# Altium PCB high_voltage_controller.PcbDoc (part 4 of 4)
Units mil, origin at the board's own origin, x right, y up, seen from the top; angles counter-clockwise.
Board outline 3135 x 1815 mil, 4 copper layers (Signal 1, Ground, Power, Signal 2), stack 23.756 mil thick; 57 components, 42 nets, 253 pads, 87 vias.
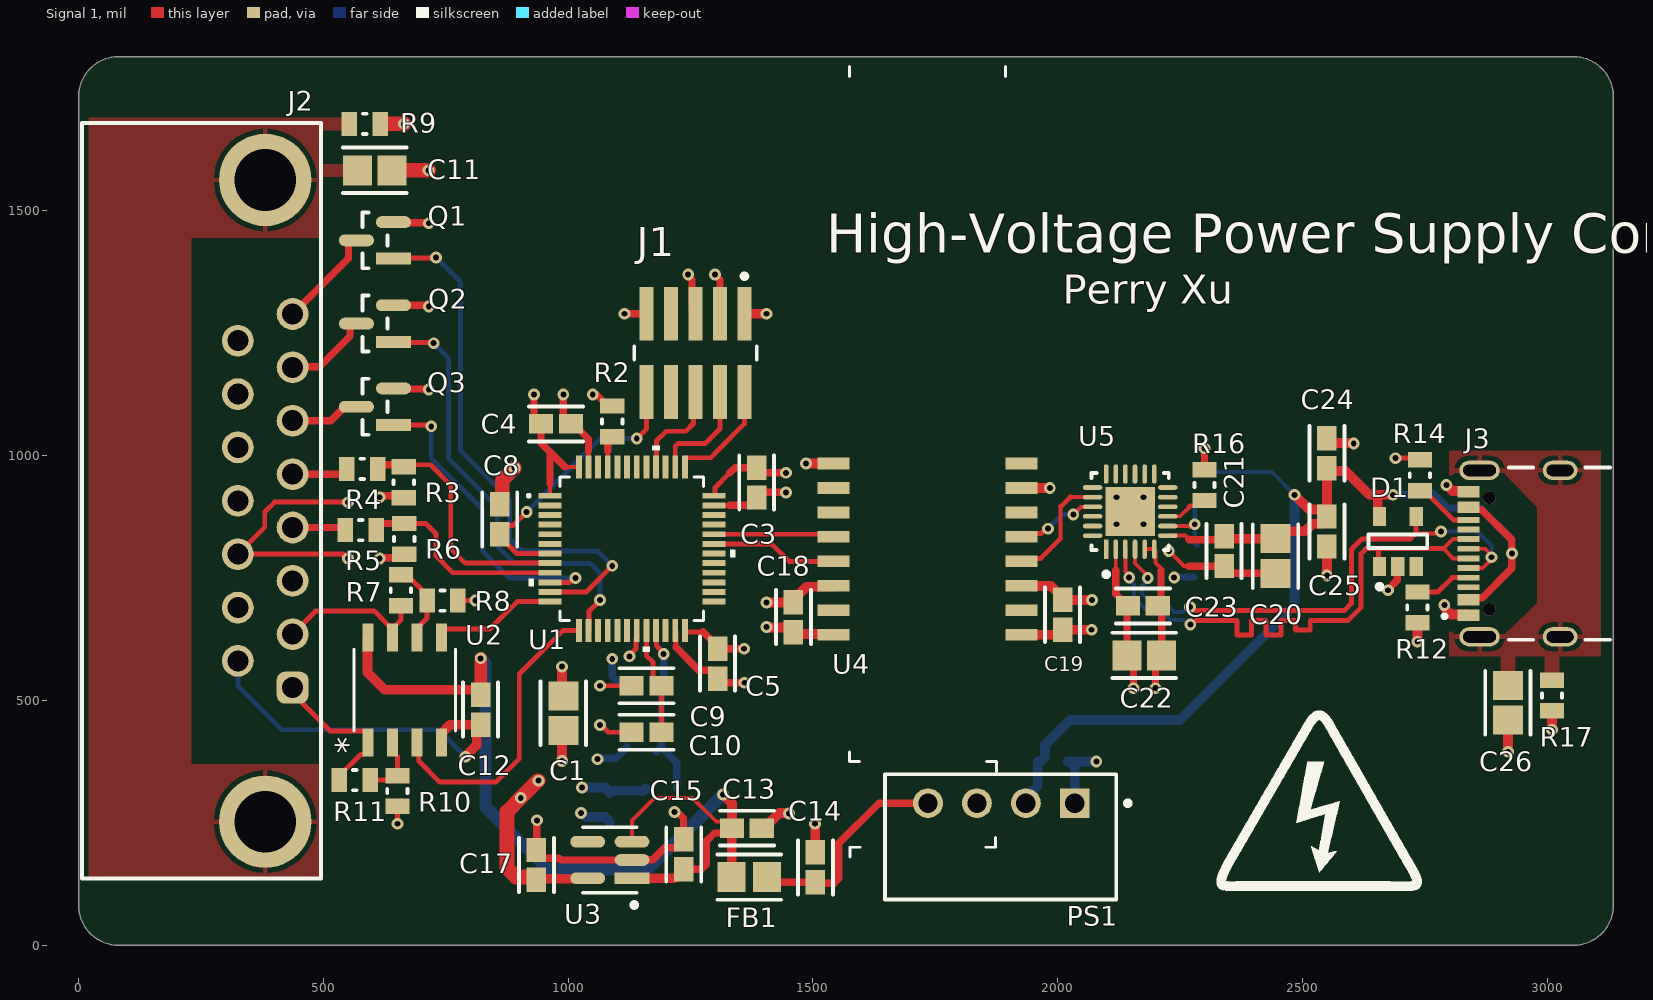
[diagram p0: Signal 1 view]

## Part data (continued)
R17: library part RC0805FR-071ML, "125mW Thick Film Resistors 150V ±100ppm/℃ ±1% 1MΩ 0805 Chip Resistor - Surface Mount ROHS", Case Code (Imperial)=0805, Manufacturer="Yageo Group", Max Operating Temperature=155°C, Max Power Dissipation=125mW, Min Operating Temperature=-55°C, Supplier Part Number=311-1.00MCRCT-ND, Temperature Coefficient=100ppm/°C, Tolerance=1%, Voltage Rating=150V, Case/Package=0805, Category="Chip SMD Resistors", China RoHS=Non-Compliant, ComponentLink1Description=https://datasheet.octopart.com:443/RC0805FR-071ML-Yageo-datasheet-175887523.pdf?src-supplier=IHS, ComponentLink1URL=https://datasheet.octopart.com:443/RC0805FR-071ML-Yageo-datasheet-175887523.pdf?src-supplier=IHS, ComponentLink2Description=https://datasheet.octopart.com:443/RC0805FR-071ML-Yageo-datasheet-103092701.pdf?src-supplier=Upverter, ComponentLink2URL=https://datasheet.octopart.com:443/RC0805FR-071ML-Yageo-datasheet-103092701.pdf?src-supplier=Upverter, ComponentLink3Description=https://datasheet.octopart.com:443/RC0805FR-071ML-Yageo-datasheet-79472498.pdf?src-supplier=Upverter, ComponentLink3URL=https://datasheet.octopart.com:443/RC0805FR-071ML-Yageo-datasheet-79472498.pdf?src-supplier=Upverter, ComponentLink4Description=https://datasheet.octopart.com:443/RC0805FR-071ML-Yageo-datasheet-8330313.pdf?src-supplier=element14+APAC, ComponentLink4URL=https://datasheet.octopart.com:443/RC0805FR-071ML-Yageo-datasheet-8330313.pdf?src-supplier=element14+APAC, ComponentLink5Description=https://datasheet.octopart.com:443/RC0805FR-071ML-Yageo-Group-datasheet-190305687.pdf?src-supplier=Future+Electronics, ComponentLink5URL=https://datasheet.octopart.com:443/RC0805FR-071ML-Yageo-Group-datasheet-190305687.pdf?src-supplier=Future+Electronics, ComponentLink6Description=https://datasheet.octopart.com:443/RC0805FR-071ML-Yageo-datasheet-164759695.pdf?src-supplier=Future+Electronics, ComponentLink6URL=https://datasheet.octopart.com:443/RC0805FR-071ML-Yageo-datasheet-164759695.pdf?src-supplier=Future+Electronics, ComponentLink7Description=https://datasheet.octopart.com:443/RC0805FR-071ML-Yageo-datasheet-127823281.pdf?src-supplier=Future+Electronics, ComponentLink7URL=https://datasheet.octopart.com:443/RC0805FR-071ML-Yageo-datasheet-127823281.pdf?src-supplier=Future+Electronics, ComponentLink8Description=https://datasheet.octopart.com:443/RC0805FR-071ML-Yageo-datasheet-137700087.pdf?src-supplier=Future+Electronics, ComponentLink8URL=https://datasheet.octopart.com:443/RC0805FR-071ML-Yageo-datasheet-137700087.pdf?src-supplier=Future+Electronics, ComponentLink9Description=https://datasheet.octopart.com:443/RC0805FR-071ML-Yageo-datasheet-12592811.pdf?src-supplier=Future+Electronics, ComponentLink9URL=https://datasheet.octopart.com:443/RC0805FR-071ML-Yageo-datasheet-12592811.pdf?src-supplier=Future+Electronics, ComponentLink10Description=https://datasheet.octopart.com:443/RC0805FR-071ML-Yageo-datasheet-8324252.pdf?src-supplier=Future+Electronics, ComponentLink10URL=https://datasheet.octopart.com:443/RC0805FR-071ML-Yageo-datasheet-8324252.pdf?src-supplier=Future+Electronics, ComponentLink11Description=https://datasheet.octopart.com:443/RC0805FR-071ML-Yageo-datasheet-62067350.pdf?src-supplier=Farnell, ComponentLink11URL=https://datasheet.octopart.com:443/RC0805FR-071ML-Yageo-datasheet-62067350.pdf?src-supplier=Farnell, ComponentLink12Description=https://datasheet.octopart.com:443/RC0805FR-071ML-Yageo-datasheet-13691069.pdf?src-supplier=Farnell, ComponentLink12URL=https://datasheet.octopart.com:443/RC0805FR-071ML-Yageo-datasheet-13691069.pdf?src-supplier=Farnell, ComponentLink13Description=https://datasheet.octopart.com/RC0805FR-071ML-Yageo-datasheet-73766026.pdf, ComponentLink13URL=https://datasheet.octopart.com/RC0805FR-071ML-Yageo-datasheet-73766026.pdf, ComponentLink14Description=https://datasheet.octopart.com:443/RC0805FR-071ML-Yageo-datasheet-118657.pdf?src-supplier=DigiKey, ComponentLink14URL=https://datasheet.octopart.com:443/RC0805FR-071ML-Yageo-datasheet-118657.pdf?src-supplier=DigiKey, ComponentLink15Description=https://datasheet.octopart.com:443/RC0805FR-071ML-Yageo-datasheet-502840.pdf?src-supplier=element14, ComponentLink15URL=https://datasheet.octopart.com:443/RC0805FR-071ML-Yageo-datasheet-502840.pdf?src-supplier=element14, ComponentLink16Description=http://sigma.octopart.com:80/conflict_mineral_statement/Yageo-company-3.pdf?src-supplier=Compliance+Statements, ComponentLink16URL=http://sigma.octopart.com:80/conflict_mineral_statement/Yageo-company-3.pdf?src-supplier=Compliance+Statements, ComponentLink17Description=http://sigma.octopart.com:80/rohs_statement/Yageo-company-2.pdf?src-supplier=Compliance+Statements, ComponentLink17URL=http://sigma.octopart.com:80/rohs_statement/Yageo-company-2.pdf?src-supplier=Compliance+Statements, Composition="Thick Film", Contact Plating=Tin, Country of Origin="Mainland China, Taiwan", Depth=1.25mm, Export Control Classification Number (ECCN) Code=EAR99, Features="Moisture Resistant", Harmonized Tariff Schedule (HTS) Code=8533.21.00.30, Height=500µm, Introduction Date=2004-09-22, Lead Free="Lead Free", Length=2mm, Lifecycle Status=Production, Manufacturer Part Number=RC0805FR-071ML, Military Standard=Not, Mounting Technology="Surface Mount", Number of Terminals=2, Number of Terminations=2, Packaging="Tape & Reel", Pins=2, Power Rating=125mW, Pricing="1=0.1, 10=0.034, 25=0.0256, 50=0.0208, 100=0.0171, 250=0.01344, 500=0.01136, 1000=0.00973 (USD)", Radiation Hardening=No, REACH SVHC=Yes, RoHS=Compliant, Schedule B="8533210045, 8533210045|8533210045, 8533210045|8533210045|8533210045, 8533210045|8533210045|8533210045|8533210045", Stock=235812, Supplier=DigiKey, Supplier 1=DigiKey, Supplier Part Number 1=311-1.00MCRCT-ND, Termination=SMD/SMT, Voltage Rating (AC)=150V, Voltage Rating (DC)=150V, Width=1.25mm, Working Voltage=150V
U1: "Microcontroller 32-Bit ARM Cortex-M4 RISC 32K-Byte Flash 3.3V 48-Pin LQFP", Case/Package=LFQFP, Clock Frequency=48MHz, Frequency=170MHz, Manufacturer=STMicroelectronics, Max Operating Temperature=85°C, Max Supply Current=29mA, Max Supply Voltage=3.6V, Min Operating Temperature=-40°C, Min Supply Voltage=1.71V, Nominal Supply Voltage (DC)=3V, Supplier Part Number=STM32G431C6T6-ND, ADC Channels (Resolution)="17-Ch 12-Bit", Category=Microcontrollers, China RoHS=Compliant, ComponentLink1Description=https://datasheet.octopart.com:443/STM32G431C6T6-STMicroelectronics-datasheet-159144895.pdf?src-supplier=Newark, ComponentLink1URL=https://datasheet.octopart.com:443/STM32G431C6T6-STMicroelectronics-datasheet-159144895.pdf?src-supplier=Newark, ComponentLink2Description=https://datasheet.octopart.com:443/STM32G431C6T6-STMicroelectronics-datasheet-144618855.pdf?src-supplier=TME, ComponentLink2URL=https://datasheet.octopart.com:443/STM32G431C6T6-STMicroelectronics-datasheet-144618855.pdf?src-supplier=TME, Core Architecture="ARM Cortex-M4", Country of Origin="Mainland China, Taiwan", DAC Channels (Resolution)="4-Ch 12-Bit", EEPROM Memory Size=0B, Export Control Classification Number (ECCN) Code=3A991.A.2, Flash Memory Size=32kB, Harmonized Tariff Schedule (HTS) Code=8542.31.00.25, Height - Seated (Max)=1.6mm, Interface=USB, Introduction Date=2019-10-29, Length=7mm, Lifecycle Status=Production, Manufacturer Part Number=STM32G431C6T6, Memory Format=FLASH, Number of A/D Converters=2, Number of Channels=17, Number of D/A Converters=2, Number of I2C Channels=3, Number of I/Os=5, Number of Interrupts=16, Number of SPI Channels=3, Number of Terminals=48, Number of Timers/Counters=12, Number of USART Channels=3, Peripherals=POR, Pricing="1=4.96, 10=3.769, 25=3.4728, 100=3.1467, 250=2.99128, 500=2.8976, 1500=2.78186, 3000=2.72522 (USD)", RAM Size=32kB, REACH SVHC=Yes, RoHS=Compliant, Schedule B="8542310000, 8542310000|8542310000|8542310000|8542310000|8542310000", Stock=1643, Supplier=DigiKey, Supplier 1=DigiKey, Supplier Part Number 1=STM32G431C6T6-ND, Terminal Pitch=500µm, Width=7mm
U2: "IC OPAMP GP 2 CIRCUIT 8SOIC / General Purpose Amplifier 2 Circuit Rail-to-Rail 8-SOIC", Case/Package=SOIC, Manufacturer="Texas Instruments", Manufacturer Lifecycle Status=ACTIVE, Supplier Part Number=296-TLV9002QDRQ1CT-ND, Category="Amplifiers - Op Amps, Buffer, Instrumentation", ComponentLink1Description=https://octopart.com:443/opatz8j6/c1?t=qNF0SmTfBXis5KuBjHu_0Lw95Gt-ppfX15eU3m0_OURFg7j8CzT1s6WowRPHsWIZbws3EfKsRzYBH_TRpeCcHToL-R8J8UZv9V6Wb1InHiIF8k8Y35NGcowJXJUYI1pnD5fADJ0R8GDNKVUWtLRHCqAGovzBPeiRsuxY5ipn9AhUhRmeYe6-OEpKfd42lu5pCk4HkhVEFD2Mur4YXRhcDV4Iflc8CkCZrl32D2A_m-0JnDbSslzSoAr2XFTf6lypRU0dY9KGNUak8fQ6OqAy5KWwSyRqBFS9rqoF33jhrK8rQgwd-x-Rf5GN-l31P0z1b0gEpQmPDdC7yH2zrnDiFm3LW_bWGcyYXUOocwlnj5ahD-Q0gTJopkT0i_QUuv2BzVg-w33TaJf5&src-supplier=Texas+Instruments, ComponentLink1URL=https://octopart.com:443/opatz8j6/c1?t=qNF0SmTfBXis5KuBjHu_0Lw95Gt-ppfX15eU3m0_OURFg7j8CzT1s6WowRPHsWIZbws3EfKsRzYBH_TRpeCcHToL-R8J8UZv9V6Wb1InHiIF8k8Y35NGcowJXJUYI1pnD5fADJ0R8GDNKVUWtLRHCqAGovzBPeiRsuxY5ipn9AhUhRmeYe6-OEpKfd42lu5pCk4HkhVEFD2Mur4YXRhcDV4Iflc8CkCZrl32D2A_m-0JnDbSslzSoAr2XFTf6lypRU0dY9KGNUak8fQ6OqAy5KWwSyRqBFS9rqoF33jhrK8rQgwd-x-Rf5GN-l31P0z1b0gEpQmPDdC7yH2zrnDiFm3LW_bWGcyYXUOocwlnj5ahD-Q0gTJopkT0i_QUuv2BzVg-w33TaJf5&src-supplier=Texas+Instruments, ComponentLink2Description=https://datasheet.octopart.com:443/TLV9002QDRQ1-Texas-Instruments-datasheet-164419143.pdf?src-supplier=Augswan, ComponentLink2URL=https://datasheet.octopart.com:443/TLV9002QDRQ1-Texas-Instruments-datasheet-164419143.pdf?src-supplier=Augswan, ComponentLink3Description=http://sigma.octopart.com:80/reach_statement/Texas-Instruments-company-64.pdf?src-supplier=Compliance+Statements, ComponentLink3URL=http://sigma.octopart.com:80/reach_statement/Texas-Instruments-company-64.pdf?src-supplier=Compliance+Statements, ComponentLink4Description=http://sigma.octopart.com:80/conflict_mineral_statement/Texas-Instruments-company-63.pdf?src-supplier=Compliance+Statements, ComponentLink4URL=http://sigma.octopart.com:80/conflict_mineral_statement/Texas-Instruments-company-63.pdf?src-supplier=Compliance+Statements, Height=1.75mm, Length=4.9mm, Lifecycle Status=Production, Manufacturer Part Number=TLV9002QDRQ1, Number of Channels=2, Pins=8, Pricing="1=0.85, 10=0.605, 25=0.5448, 100=0.4781, 250=0.44628, 500=0.42712, 1000=0.41157 (USD)", RoHS=Compliant, Stock=6623, Supplier=DigiKey, Supplier 1=DigiKey, Supplier Part Number 1=296-TLV9002QDRQ1CT-ND, Thickness=1.58mm, Width=3.91mm
U3: "500mA high-PSRR low-IQ low-dropout voltage regulator with enable 5-SOT-23 -40 to 125", Ambient Temperature Range High=70°C, Case/Package=SOT-23, Dropout Voltage=150mV, Manufacturer="Texas Instruments", Manufacturer Lifecycle Status=ACTIVE, Max Junction Temperature (Tj)=125°C, Max Supply Voltage=5.5V, Min Operating Temperature=-40°C, Min Supply Voltage=1.45V, Output Current=500mA, Output Voltage=3.3V, Supplier Part Number=296-50411-1-ND, Supplier Part Number 1=296-50411-6-ND, Accuracy=1%, Category="LDO Voltage Regulators", ComponentLink1Description=https://sigma.octopart.com:443/177332311/technical_drawing/Texas-Instruments-TLV75533PDBVR.pdf?src-supplier=Texas+Instruments, ComponentLink1URL=https://sigma.octopart.com:443/177332311/technical_drawing/Texas-Instruments-TLV75533PDBVR.pdf?src-supplier=Texas+Instruments, ComponentLink2Description=https://octopart.com:443/opatz8j6/c1?t=pJCVaXVeocVDo2Na9Kz930KxP9WlbiHXFzp-cQRqTk1WLxn6m8yxr6zxC1qRiDO0P_B3TiiuwP3Uo1LDv2eRfTeEuBJrPQF3Oh-DFONYjT4exTF0sQ6pd-H5AatGceck4ln_JcF3-R-BErslWVzv623L6IukQ_TOt0x7LXU8RILPbqx6us3vBntWGrun-G6tr_IHIxh-feVSoK34ieYhQ_JVJrErYkpsrpwqVOt_yyM0k7uf37aToqtChFiZzNVVy5WYj6k7cBc_KdiLCxhvxPtOSSpNghqOyQUHV-_rQVYn-daD9p5-KiJBmOr9BwrYpLpqUfPHDzEwZhbVwq2n-NV-PEE87B7xehb_44GvCcMDZl8973qxGpT8jPpN2VSikqP0OFo&src-supplier=Texas+Instruments, ComponentLink2URL=https://octopart.com:443/opatz8j6/c1?t=pJCVaXVeocVDo2Na9Kz930KxP9WlbiHXFzp-cQRqTk1WLxn6m8yxr6zxC1qRiDO0P_B3TiiuwP3Uo1LDv2eRfTeEuBJrPQF3Oh-DFONYjT4exTF0sQ6pd-H5AatGceck4ln_JcF3-R-BErslWVzv623L6IukQ_TOt0x7LXU8RILPbqx6us3vBntWGrun-G6tr_IHIxh-feVSoK34ieYhQ_JVJrErYkpsrpwqVOt_yyM0k7uf37aToqtChFiZzNVVy5WYj6k7cBc_KdiLCxhvxPtOSSpNghqOyQUHV-_rQVYn-daD9p5-KiJBmOr9BwrYpLpqUfPHDzEwZhbVwq2n-NV-PEE87B7xehb_44GvCcMDZl8973qxGpT8jPpN2VSikqP0OFo&src-supplier=Texas+Instruments, ComponentLink3Description=https://sigma.octopart.com:443/175570406/technical_drawing/Texas-Instruments-TLV75533PDBVR.pdf?src-supplier=Texas+Instruments, ComponentLink3URL=https://sigma.octopart.com:443/175570406/technical_drawing/Texas-Instruments-TLV75533PDBVR.pdf?src-supplier=Texas+Instruments, ComponentLink4Description=https://sigma.octopart.com:443/169406034/technical_drawing/Texas-Instruments-TLV75533PDBVR.pdf?src-supplier=Texas+Instruments, ComponentLink4URL=https://sigma.octopart.com:443/169406034/technical_drawing/Texas-Instruments-TLV75533PDBVR.pdf?src-supplier=Texas+Instruments, ComponentLink5Description=https://sigma.octopart.com:443/155939316/technical_drawing/Texas-Instruments-TLV75533PDBVR.pdf?src-supplier=Texas+Instruments, ComponentLink5URL=https://sigma.octopart.com:443/155939316/technical_drawing/Texas-Instruments-TLV75533PDBVR.pdf?src-supplier=Texas+Instruments, ComponentLink6Description=https://sigma.octopart.com:443/102331370/technical_drawing/Texas-Instruments-TLV75533PDBVR.pdf?src-supplier=Texas+Instruments, ComponentLink6URL=https://sigma.octopart.com:443/102331370/technical_drawing/Texas-Instruments-TLV75533PDBVR.pdf?src-supplier=Texas+Instruments, ComponentLink7Description=https://datasheet.octopart.com:443/TLV75533PDBVR-Texas-Instruments-datasheet-150455022.pdf?src-supplier=Augswan, ComponentLink7URL=https://datasheet.octopart.com:443/TLV75533PDBVR-Texas-Instruments-datasheet-150455022.pdf?src-supplier=Augswan, ComponentLink8Description=https://datasheet.octopart.com:443/TLV75533PDBVR-Texas-Instruments-datasheet-165804640.pdf?src-supplier=LCSC, ComponentLink8URL=https://datasheet.octopart.com:443/TLV75533PDBVR-Texas-Instruments-datasheet-165804640.pdf?src-supplier=LCSC, ComponentLink9Description=https://datasheet.octopart.com:443/TLV75533PDBVR-Texas-Instruments-datasheet-159117836.pdf?src-supplier=LCSC, ComponentLink9URL=https://datasheet.octopart.com:443/TLV75533PDBVR-Texas-Instruments-datasheet-159117836.pdf?src-supplier=LCSC, ComponentLink10Description=http://sigma.octopart.com:80/reach_statement/Texas-Instruments-company-64.pdf?src-supplier=Compliance+Statements, ComponentLink10URL=http://sigma.octopart.com:80/reach_statement/Texas-Instruments-company-64.pdf?src-supplier=Compliance+Statements, ComponentLink11Description=http://sigma.octopart.com:80/conflict_mineral_statement/Texas-Instruments-company-63.pdf?src-supplier=Compliance+Statements, ComponentLink11URL=http://sigma.octopart.com:80/conflict_mineral_statement/Texas-Instruments-company-63.pdf?src-supplier=Compliance+Statements, Height=1.45mm, Length=2.9mm, Lifecycle Status=Production, Manufacturer Part Number=TLV75533PDBVR, Max Operating Temperature=125°C, Number of Channels=1, Number of Outputs=1, Pins=5, Pricing="1=0.42, 10=0.293, 25=0.2612, 100=0.226, 250=0.20924, 500=0.19914, 1000=0.1908 (USD)", RoHS=Compliant, Schedule B=8542390000, Stock=109318, Supplier=DigiKey, Supplier 1=DigiKey, Thickness=1.2mm, Width=1.6mm
U4: "Robust EMC, dual-channel, 1/1, reinforced digital isolator 16-SOIC -55 to 125", Case/Package=SOIC, Manufacturer="Texas Instruments", Manufacturer Lifecycle Status=ACTIVE, Max Operating Temperature=125°C, Min Operating Temperature=-55°C, Supplier Part Number=296-50346-1-ND, Category="Digital Isolators", ComponentLink1Description=https://sigma.octopart.com:443/99572200/technical_drawing/Texas-Instruments-ISO7721FDWR.pdf?src-supplier=Texas+Instruments, ComponentLink1URL=https://sigma.octopart.com:443/99572200/technical_drawing/Texas-Instruments-ISO7721FDWR.pdf?src-supplier=Texas+Instruments, ComponentLink2Description=https://octopart.com:443/opatz8j6/c1?t=WZGGJDtRhiNR6xegtZ0Vzw6Jo8gIA4OkeL83hLNHBc3xALLZrOPA1KnNx-ec0I_-l9PCMZWyk75e5H8g6RMrJLmMNblHietK_abbQyImjN_oP_YsooAsDmW-v19do6DZ4jzx_Fx10KWDm9m_aOouo5hdul-hNs1fyUCmYsyFAGwxgQVoL5HSj0hs2mmPUZ1tA5owilxFZB39lP5Z4zu9Z-zIWmlA_gcYXWOi0ejZsd6FGsUjnxzOjqnuUWppL6xj46YVsAzbwlJm8vaSz28l_1Pzc2Ovu0xt7ToOzTyA-3S1SSaUiJRJiBHsaq__PSD3_uPcVRWFFlJ45olTYWRTRE-pIoFVMvQ4rQZJrKrEDyxEsTd4Z0hpONkN6dpwLsYRK33xwkk&src-supplier=Texas+Instruments, ComponentLink2URL=https://octopart.com:443/opatz8j6/c1?t=WZGGJDtRhiNR6xegtZ0Vzw6Jo8gIA4OkeL83hLNHBc3xALLZrOPA1KnNx-ec0I_-l9PCMZWyk75e5H8g6RMrJLmMNblHietK_abbQyImjN_oP_YsooAsDmW-v19do6DZ4jzx_Fx10KWDm9m_aOouo5hdul-hNs1fyUCmYsyFAGwxgQVoL5HSj0hs2mmPUZ1tA5owilxFZB39lP5Z4zu9Z-zIWmlA_gcYXWOi0ejZsd6FGsUjnxzOjqnuUWppL6xj46YVsAzbwlJm8vaSz28l_1Pzc2Ovu0xt7ToOzTyA-3S1SSaUiJRJiBHsaq__PSD3_uPcVRWFFlJ45olTYWRTRE-pIoFVMvQ4rQZJrKrEDyxEsTd4Z0hpONkN6dpwLsYRK33xwkk&src-supplier=Texas+Instruments, ComponentLink3Description=https://sigma.octopart.com:443/49250197/technical_drawing/Texas-Instruments-ISO7721FDWR.pdf?src-supplier=Texas+Instruments, ComponentLink3URL=https://sigma.octopart.com:443/49250197/technical_drawing/Texas-Instruments-ISO7721FDWR.pdf?src-supplier=Texas+Instruments, ComponentLink4Description=https://datasheet.octopart.com:443/ISO7721FDWR-Texas-Instruments-datasheet-164414773.pdf?src-supplier=Augswan, ComponentLink4URL=https://datasheet.octopart.com:443/ISO7721FDWR-Texas-Instruments-datasheet-164414773.pdf?src-supplier=Augswan, ComponentLink5Description=https://datasheet.octopart.com:443/ISO7721FDWR-Texas-Instruments-datasheet-82513802.pdf?src-supplier=HQonline, ComponentLink5URL=https://datasheet.octopart.com:443/ISO7721FDWR-Texas-Instruments-datasheet-82513802.pdf?src-supplier=HQonline, ComponentLink6Description=http://sigma.octopart.com:80/reach_statement/Texas-Instruments-company-64.pdf?src-supplier=Compliance+Statements, ComponentLink6URL=http://sigma.octopart.com:80/reach_statement/Texas-Instruments-company-64.pdf?src-supplier=Compliance+Statements, ComponentLink7Description=http://sigma.octopart.com:80/conflict_mineral_statement/Texas-Instruments-company-63.pdf?src-supplier=Compliance+Statements, ComponentLink7URL=http://sigma.octopart.com:80/conflict_mineral_statement/Texas-Instruments-company-63.pdf?src-supplier=Compliance+Statements, Height=2.65mm, Length=10.3mm, Lifecycle Status=Production, Manufacturer Part Number=ISO7721FDWR, Number of Channels=2, Pins=16, Pricing="1=2.81, 10=2.094, 25=1.9152, 100=1.719, 250=1.62544, 500=1.5912 (USD)", RoHS=Compliant, Schedule B=8542390000, Stock=15127, Supplier=DigiKey, Supplier 1=DigiKey, Supplier Part Number 1=296-50346-1-ND, Thickness=2.35mm, Width=7.5mm
U5: "IC Usb to Uart Bridge QFN24 / Usb Bridge, Usb to Uart Usb 2.0 Uart Interface 24-QFN (4X4)", Ambient Temperature Range High=85°C, Manufacturer="Silicon Lab", Manufacturer Lifecycle Status="FULL PRODUCTION", Max Junction Temperature (Tj)=105°C, Max Supply Voltage=3.6V, Min Operating Temperature=-40°C, Min Supply Voltage=3V, Nominal Supply Voltage (DC)=3.3V, Supplier Part Number=336-5888-1-ND, Temperature Grade=Industrial, Category="USB Interface ICs", China RoHS=Compliant, ComponentLink1Description=https://datasheet.octopart.com:443/CP2102N-A02-GQFN24R-Silicon-Labs-datasheet-138898368.pdf?src-supplier=SHENGYU+ELECTRONICS, ComponentLink1URL=https://datasheet.octopart.com:443/CP2102N-A02-GQFN24R-Silicon-Labs-datasheet-138898368.pdf?src-supplier=SHENGYU+ELECTRONICS, ComponentLink2Description=https://datasheet.octopart.com:443/CP2102N-A02-GQFN24R-Silicon-Labs-datasheet-166051788.pdf?src-supplier=Burklin+Elektronik, ComponentLink2URL=https://datasheet.octopart.com:443/CP2102N-A02-GQFN24R-Silicon-Labs-datasheet-166051788.pdf?src-supplier=Burklin+Elektronik, Data Rate=1.5Mbps, Harmonized Tariff Schedule (HTS) Code=8542.31.00.30, Height=800µm, Height - Seated (Max)=800µm, Interface=UART, Introduction Date=2019-03-12, Length=4mm, Lifecycle Status=Production, Manufacturer Part Number=CP2102N-A02-GQFN24R, Max Operating Temperature=85°C, Number of Digital IO=4, Number of Terminals=24, Pricing="1=4.89, 10=3.699, 25=3.402, 100=3.0755, 250=2.9198, 500=2.82596 (USD)", REACH SVHC=Yes, RoHS=Compliant, Schedule B="8542390000, 8542390000|8542390000|8542390000|8542390000|8542390000", Stock=19089, Supplier=DigiKey, Supplier 1=DigiKey, Supplier Part Number 1=336-5888-1-ND, Terminal Pitch=500µm, Width=4mm

## Via types
v1: diameter 24, hole 12, Signal 1 to Signal 2, tented both sides, 87 vias

## Nets (pads, with @x,y where several pads share a name; then routed paths per layer and width w, separated by ;. In a path a pad name is that pad's centre, name@x,y a point inside that pad or via, vN(x,y) a via of type N, cw(c..) or ccw(c..) an arc to the next point about the centre after c; other vN are vias at no path point)
3V3: C1.1 C2.1 C3.1 C4.1 C5.1 C17.1 C18.1 J1.1 R1.2 U1.1 U1.24 U1.36 U1.48 U3.5 U4.14 | length 1401.2
  Signal 1 w8: U1.1 962.68,942.68 ; 992.68,977.32 U1.48
  Signal 1 w10: U1.24 1238.27,641 1239.27,640 1275.43,640 ; U1.36 1299,918.27 1300,919.27 1300,935 1330,965 ; v1(1359.41,605.59) v1@1360,605
  Signal 1 w15: v1(930,1125) 930,1077.42 942.42,1065 C4.1 944.41,1025.59 960,1010 ; 962.68,942.68 962.68,1007.32 960,1010 ; 992.68,977.32 960,1010 ; 1275.43,640 C5.1@1305,610.43 ; C5.1 v1(1359.41,605.59) ; 1330,965 1340.59,975.59 C3.1 1395.59,965 v1(1445,965)
  Signal 1 w20: C17.1 937.4,135.81 1038.92,135.81 U3.5 ; v1@987,377.08 987,435.54 C1.1 ; J1.1 1404.88,1290.12 v1(1405,1290) ; v1(1405,700) 1405.3,700.3 1459.7,700.3 C18.1 1460,705.43 1486.76,732.19 1540.26,732.19 U4.14
  Signal 1 w30: C17.1 935,134.39 930.08,139.31 892.57,139.31 875,156.89 875,273 v1(903,301) 938,336 v1(939,336)
  Signal 2 w20: v1@1029.08,322 1075.08,322 1085,312.08 C2.1 1089.7,315.3 1153.8,315.3 R1.2
  other v1: 1028,322 987,376
5V: C12.1 C13.1 C15.1 FB1.1 U2.8 U3.1 U3.3 | length 2095.4
  Signal 1 w8: U3.3 1130.29,254.29 1176.52,300.52 1254,300.52 1302.33,252.19 1316.38,252.19 C13.1@1319.57,249 ; C13.1@1331.99,241.42 1324.41,249 C13.1@1319.57,249 ; C13.1 1329.57,239 C13.1@1319.57,249
  Signal 1 w15: C15.1 1271.45,155 1282,165.55 1282,212.36 1298.72,229.08 C13.1@1324.49,229.08
  Signal 1 w20: U2.8@590,628.25 590,557 625,522 690,522 740,522 811.08,522 821,512.08 C12.1 ; U3.1 1217.6,136.6 1221.23,140.23 1226.08,140.23 1236,150.16 C15.1 ; v1(1316,308) 1334.41,289.59 C13.1 C13.1@1333.98,238.57 ; C13.1@1324.49,229.08 C13.1@1333.98,238.57 ; FB1.1@1327.97,128.41 FB1.1@1333.56,134 ; FB1.1 1331.56,141 1326.56,141 FB1.1@1333.56,134 ; FB1.1@1333.56,134 1333.98,134.43 C13.1@1333.98,238.57
  Signal 1 w25: C12.1@821,512.08 v1(821,586)
  Signal 2 w25: v1(821,586) 831,576 831,282.02 958.02,155 1163,155 v1(1316,308)
D_N: D1.4 J3.A7 J3.B7 U5.4 | length 1159.8
  Signal 1 w8: U5.4 2158.02,780.31 2184,754.33 v1(2184,750) ; 2721,830 2732.4,841.4 2770.31,841.4 2770.85,841.94 2779.94,841.94 v1(2783,845) ; J3.B7 2868.47,770.47 2886.26,788.26 v1(2886.26,792.5) 2886.26,796.74 2873.16,809.84 J3.A7
  Signal 1 w10: v1(2270.38,691) 2274.17,691 2281.71,683.46 2585.17,683.46 2600,698.28 2600,808.28 2621.72,830 2721,830 ; 2732.4,841.4 D1.4
  Signal 2 w8: v1(2184,750) 2184,745.67 2172.76,734.43 2172.76,717.16 2196.87,693.04 2225.16,693.04 2237.16,681.04 2256.1,681.04 2266.05,691 v1(2270.38,691) ; v1(2783,845) 2858,845 2886.26,816.74 v1(2886.26,792.5)
D_P: D1.1 J3.A6 J3.B6 U5.3 | length 1204.5
  Signal 1 w8: U5.3 2138.34,762.99 2146,755.33 v1(2146,751) ; D1.1@2655.52,776.09 D1.1 ; J3.A6 2807.84,790.16 2788,810 2807.53,829.53 J3.B6
  Signal 1 w10: v1(2271,655) 2274.79,655 2283.25,663.46 2331,663.46 2366,663.46 2366,633.46 2396,633.46 2396,663.46 2426,663.46 2426,633.46 2456,633.46 2456,663.46 2486,663.46 2486,644.06 2516,644.06 2516,663.46 2572,663.46 2593.46,663.46 2620,690 2620,800 2630,810 2655.52,810 ; D1.1@2655.52,776.09 2655.52,810 ; 2788,810 2655.52,810
  Signal 2 w8: v1(2146,751) 2146,746.67 2155.76,736.91 2155.76,710.12 2189.83,676.04 2218.12,676.04 2230.12,664.04 2257.63,664.04 2266.67,655 v1(2271,655)
DB15_SHIELD_POUR: C11.1 J2.M1 J2.M2 R9.2
GND: C1.2 C2.2 C3.2 C4.2 C5.2 C6.2 C7.2 C8.2 C9.2 C10.2 C11.2 C12.2 C13.2 C14.2 C15.2 C17.2 C18.2 J1.3 J1.5 J1.9 J2.9 J2.11 J2.14 J2.15 PS1.3 Q1.2 Q2.2 Q3.2 R2.1 R3.2 R6.1 R8.2 R9.1 R10.2 U1.19 U1.23 U1.35 U1.47 U2.4 U3.2 U4.9 U4.16 | length 3977.6
  Signal 1 w10: 541.22,798.78 v1(550,790) 546.21,790 537.43,798.78 J2.11 380,853.78 380,885 400,905 v1(550,905) ; v1(651,248) R10.2 ; R8.2 v1(810,704) ; U1.47 1041.42,1010 ; v1(1065,450) 1067.14,450 1082.14,435 C10.2 ; v1(1065,530) C9.2 ; v1@1125,592.44 1138.34,605.78 U1.19@1138.34,626.68 ; U1.23 1220.08,641.18 1220.08,610 ; U1.35 1330,898.58
  Signal 1 w15: v1(615,790) 616.72,791.72 658.22,791.72 R6.1 ; v1(615,915) 617.44,915 620.94,918.5 R3.2@665,918.5 ; Q3.2 644,1136.2 713.8,1136.2 v1(715,1135) ; Q2.2 712.6,1307.4 v1(715,1305) ; Q1.2 644,1476.2 713.8,1476.2 v1(715,1475) ; v1(936,255) 935.5,254.5 935.5,195.09 C17.2 935,189.75 947.42,177.32 981.16,177.32 984.48,174 U3.2 1130.62,174.32 1172.32,174.32 1196.91,198.91 1223.58,198.91 1236,211.34 1235.5,211.84 1235.5,259.06 1224.28,270.28 1218.72,270.28 v1(1217,272) ; v1(990,1125) 990,1077.42 1002.42,1065 C4.2 1010.43,1065 1041.42,1034.02 1041.42,1010 ; v1(1050,1125) 1057.64,1125 1081.14,1101.5 R2.1 ; v1(1115.12,1290.12) J1.9 ; v1(1125,590) v1@1125,592.44 ; 1220.08,610 1220.08,608.45 1266.86,561.68 1292.58,561.68 1305,549.25 C5.2 1313.41,536 v1(1360,536) ; v1(1245,1370) 1245,1367.56 1252.93,1359.63 1252.93,1297.19 J1.5 ; v1(1300,1370) 1310,1360 J1.3 ; 1330,898.58 1372.58,898.58 1385,911.01 C3.2 1395.59,925 v1(1445,925) ; C14.2 1505,184.75 C14.2@1517.42,172.32
  Signal 1 w20: U2.4@740,413.75 740,431.5 758.91,450.41 C12.2 812.88,442.29 812.88,408.96 790,386.08 v1(790,385) ; v1(987,569) 987,512.46 C1.2 ; C13.2 1400.43,239 1431.13,269.69 1450.31,269.69 v1(1451,269) ; v1(1405,650) 1405.77,649.23 1450.17,649.23 C18.2 1463.6,635.81 1540.26,635.81 U4.16 ; v1(1486,984) U4.9 ; v1(1504,248) 1504.5,247.5 1504.5,190.09 C14.2
  Signal 1 w30: R9.1 v1(664.48,1678.01) ; C11.2 v1(714.48,1583.01) ; C8.2 864.92,905.51 864.92,949.92 v1(890,975)
  Signal 2 w10: J2.9 325,530 415,440 735,440 v1(790,385)
  Signal 2 w15: v1(1060,380) 1062.44,380 1064.3,381.87 1097.42,381.87 1119.54,403.98 C7.2 ; v1(1090,585) 1090,549.57 1124.57,515 C6.2
  Signal 2 w20: v1(1026,270) 1027.08,270 1035.08,262.01 1075.08,262.01 1085,252.08 C2.2
NetC6_1: C6.1 C7.1 R1.1 U1.21 | length 358.7
  Signal 1 w10: U1.21 1180.71,641.18 1180.71,611.72 1182.44,610 v1@1195,597.44
  Signal 1 w15: v1(1195,595) v1@1195,597.44
  Signal 2 w15: C7.1@1180,394.54 C7.1 ; v1(1195,595) 1195,519.41 1190.46,514.87 C7.1 ; R1.1 1221.5,372.95 1190.46,403.98 C7.1
NetC9_1: C9.1 C10.1 U1.20 | length 223.4
  Signal 1 w10: U1.20 1159.53,610 1159.53,591.45 1173.32,577.65 1173.32,542.42 1185.75,530 C9.1 C10.1
NetC14_1: C14.1 FB1.2 PS1.4 | length 451
  Signal 1 w15: FB1.2@1406.44,134 FB1.2@1412.03,128.41 ; FB1.2 1417.03,128.41 C14.1 1506.62,126.79 1543.21,126.79 1553,136.58 1553,208 1635,290 PS1.4
NetJ2_1: J2.1 R11.1 U2.1 | length 324
  Signal 1 w10: J2.1 457.35,505.6 457.35,493.65 513.5,437.5 585,437.5 591,431.5 U2.1 591,396 585,390 576.65,390 532.5,345.86 R11.1
NetJ2_2: J2.2 R7.1 U2.7 | length 324.8
  Signal 1 w10: J2.2 484.61,683 603.28,683 621,665.28 621,665 U2.7@640,646 ; U2.7@640,628.25 U2.7@640,646 ; R7.1 658,664 U2.7@640,646
  Signal 2 w10: J2.2 J2.2@450.39,635.2
NetJ2_4: J2.4 R5.1 | length 108.1
  Signal 1 w15: J2.4 540.2,853.31 R5.1@543.5,850
NetJ2_5: J2.5 R4.1 | length 109.9
  Signal 1 w15: J2.5 535.87,962.36 R4.1@543.5,970
NetJ2_6: J2.6 Q3.3 | length 142.2
  Signal 1 w15: J2.6 514.87,1071.42 543.45,1100 Q3.3
NetJ2_7: J2.7 Q2.3 | length 180.1
  Signal 1 w15: J2.7 438.13,1181.79 491.79,1181.79 554.12,1244.12 554.12,1265.69 558.43,1270 Q2.3
NetJ2_8: J2.8 Q1.3 | length 211.5
  Signal 1 w15: J2.8 550.95,1403.67 550.95,1435.69 555.26,1440 Q1.3
NetJ3_A5: J3.A5 R12.2 | length 116.5
  Signal 1 w10: R12.2 2776.5,721.5 2805.79,750.79 J3.A5
NetJ3_B5: J3.B5 R14.1 | length 124.1
  Signal 1 w10: R14.1 2748.86,928.5 2808.46,868.9 J3.B5
NetQ1_1: Q1.1 U1.11 | length 1107.6
  Signal 1 w10: Q1.1 644,1403.8 728.8,1403.8 v1(730,1405) ; U1.11 1036.42,721.42 v1(1090,775)
  Signal 2 w10: v1(730,1405) 780,1355 780,1010 880,910 880,830 905,805 990,805 1060,805 v1(1090,775)
NetQ2_1: Q2.1 U1.14 | length 912
  Signal 1 w10: Q2.1 644.1,1231.3 723.7,1231.3 v1(725,1230) ; U1.14 1042.42,643.68 1042.42,682.42 v1(1065,705)
  Signal 2 w10: v1(725,1230) 755,1200 755,995 855,895 855,815 890,780 990,780 1045,780 1065,760 v1(1065,705)
NetQ3_1: Q3.1 U1.10 | length 645.6
  Signal 1 w10: Q3.1 717.4,1062.6 v1(720,1060) ; U1.10 1002.31,741.1 1011.21,750 v1(1015,750)
  Signal 2 w10: v1(720,1060) 720,995 825,890 825,805 880,750 990,750 v1(1015,750)
NetR2_2: R2.2 U1.45 | length 65.6
  Signal 1 w10: U1.45 1080.79,1010
  Signal 1 w15: 1080.79,1010 1080.79,1030.26 1089.04,1038.5 R2.2
NetR3_1: R3.1 R4.2 U1.8 | length 522.3
  Signal 1 w10: R3.1@665,981.5 718.5,981.5 760,940 760,810 789.53,780.47 U1.8
  Signal 1 w15: R4.2@606.5,970 606.5,973.25 614.74,981.5 R3.1@665,981.5
NetR5_2: R5.2 R6.2 U1.9 | length 430.9
  Signal 1 w10: R6.2 708.5,861.5 730,840 730,795 764.21,760.79 U1.9
  Signal 1 w15: R5.2@606.5,850 606.5,853.25 614.74,861.5 R6.2
NetR7_2: R7.2 R8.1 U2.6 | length 169
  Signal 1 w10: R7.2@655,754.5 663.75,745.75 681.57,745.75 700.76,726.56 700.76,714.75 R8.1 711.5,667.5 690,646 U2.6@690,628.25
NetR10_1: R10.1 R11.2 U2.2 | length 130.8
  Signal 1 w10: R11.2 641.5,337 R10.1 651,386 641,396 U2.2
NetR13_1: R13.1 R15.2 U5.8 | length 145.6
  Signal 1 w8: U5.8 2268,856.26
  Signal 1 w10: 2268,856.26 2272.47,856.26 2276.21,860 v1(2280,860)
  Signal 2 w10: R13.1 2280,821.5 R15.2
NetR16_1: R16.1 U5.9 | length 88.5
  Signal 1 w8: U5.9 2225.29,876.23 2249.82,876.23 2268,894.41
  Signal 1 w10: 2268,894.41 2271.34,897.76 2289.25,897.76 R16.1
NetU1_12: U1.12 U2.5 | length 259
  Signal 1 w10: U2.5 741,640 747,646 840,646 895.73,701.73 U1.12
NetU1_13: U1.13 U2.3 | length 613.6
  Signal 1 w10: U2.3 694.54,410.21 694.54,376.32 737.86,333 852,333 900,381 900,554 988.68,642.68 U1.13
NetU1_31: U1.31 U4.13 | length 259.6
  Signal 1 w10: U1.31 1390,819.84 1415.16,819.84 1451,784 U4.13
NetU1_32: U1.32 U4.12 | length 247
  Signal 1 w10: U1.32 1536.54,839.53 U4.12
NetU4_4: U4.4 U5.20 | length 237.9
  Signal 1 w8: 2006,831 2006,896 ; 2028,915.32 U5.20
  Signal 1 w10: U4.4 1932.15,790.22 1965.22,790.22 2006,831 ; 2006,896 2025.31,915.32 2028,915.32
NetU4_5: U4.5 U5.21 | length 171
  Signal 1 w8: v1(2032,880) 2047.36,895.36 2071.09,895.36 U5.21
  Signal 1 w10: U4.5 1932.74,840.81 1966.02,840.81 1976.21,851 v1(1980,851)
  Signal 2 w10: v1(1980,851) 2009,880 v1(2032,880)
nRST: C8.1 J1.10 U1.7 | length 583.1
  Signal 1 w10: C8.1@860,834.57 894.41,800.16 U1.7 ; C8.1 860,842.73 874.92,857.66 887.66,857.66 v1(915,885) ; v1(1140,1035) 1160,1055 J1.10
  Signal 2 w10: v1(915,885) 930,900 1040,1010 1065,1035 v1(1140,1035)
SWCLK: J1.4 U1.38 | length 223
  Signal 1 w10: U1.38 1218.58,1010 1218.58,1019.14 1224.44,1025 1280,1025 1310,1055 J1.4
SWDIO: J1.2 U1.37 | length 233.2
  Signal 1 w10: U1.37 1238.27,994.82 1239.27,995.82 1290.82,995.82 1305,1010 1360,1065 J1.2
SWO: J1.6 U1.40 | length 209.5
  Signal 1 w10: U1.40 1180.21,978.32 1180.21,1010 1180.21,1030.21 1200,1050 1240,1050 1255.82,1065.82 1255.82,1125.7 J1.6
UART_USB_3V3: C19.1 C22.1 C23.1 R16.2 U4.3 U5.5 U5.6 | length 522.8
  Signal 1 w8: U5.5 U5.6 2200.18,806.18 2200.18,781.11 2211,770.29 2211,766
  Signal 1 w15: v1(2200,525) 2200,579.54 C22.1 2212.46,685.13 C23.1 2211,699.41 2211,766 ; R16.2 v1(2300,1015)
  Signal 1 w20: U4.3 1986.43,734 2010,710.43 C19.1 2010.59,705 v1(2070,705)
USB_GND: C16.2 C19.2 C20.2 C21.2 C22.2 C23.2 C24.2 C25.2 C26.2 D1.2 J3.A1_B12 J3.B1_A12 PS1.1 R12.1 R14.2 R15.1 R17.1 U4.1 U4.7 U5.2 U5.25 | length 1417.8
  Signal 1 w8: 2118.65,766 2118.65,766.35 ; U5.2 2118.65,766.35 ; 2119,766 2118.65,766.35 ; v1(2227.11,805.14) 2257.84,774.41 2268,774.41
  Signal 1 w10: v1(2690,995) 2736.5,995 R14.2
  Signal 1 w15: 2118.65,766 2118.65,717.76 2126.14,710.27 2126.14,705.42 2138.57,693 C23.2 2141.54,691.13 C22.2 2155,578.54 v1(2155,525) ; 2268,774.41 C21.2 2340,771.96 2352.42,759.54 C20.2 ; v1(2675,725) 2675,726.53 2693.68,745.21 2693.68,772.7 D1.2
  Signal 1 w20: U4.1 2000.08,634 2010,643.92 C19.2 v1(2069.41,644.41) ; U4.7 v1(1984,934) ; v1(2550,755) C25.2 ; C24.2 2559.83,1025.77 2604.23,1025.77 v1(2605,1025) ; v1(2735,620) R12.1 ; v1(2790,695) 2790.77,694.23 2790.77,688.78 2803.72,675.83 2837.59,675.83 J3.A1_B12 ; v1(2794.08,940) 2806.29,927.8 2837.59,927.8 J3.B1_A12 ; v1(2920,395) C26.2 ; v1(3010,440) R17.1
  Signal 2 w15: v1(2238,751) 2239.25,752.25 2277.24,752.25 R15.1@2277.74,752.75
  Signal 2 w20: C16.2 v1(2079,375) ; C16.2@2025.08,375 2035,365.08 PS1.1
  other v1: 2120,860 2175,860 2120,915 2175,915
USB_SHIELD_POUR: C26.1 J3.SH1 J3.SH2 J3.SH3 J3.SH4 R17.2
VBUS: C16.1 C20.1 C21.1 C24.1 C25.1 D1.5 J3.A4_B9 J3.B4_A9 PS1.2 R13.2 U5.7 | length 2542.1
  Signal 1 w8: U5.7 2260.59,836.57 2268,829.17
  Signal 1 w15: 2268,829.17 2268.67,828.5 2332.91,828.5 C21.1 C21.1@2345.13,830.46 ; J3.A4_B9 2843.71,709.82 2867.82,709.82 2928,770 v1(2928,800) 2928,827.93 2865.75,890.18 2843.71,890.18 J3.B4_A9
  Signal 1 w20: C21.1@2345.13,830.46 C20.1 2460.17,845.63 2505.63,845.63 2520.82,860.82 2540.08,860.82 2550,870.75 C25.1 2550,880.08 2540.08,890 2513.93,890 v1(2483.93,920) ; C25.1@2550,890 C24.1 ; C24.1@2550.16,974.41 2555.59,968.97 2588.21,968.97 2637.18,920 2650,920 ; D1.5 2654.02,879.57 2654.02,915.98 2650,920 ; v1@2683.92,920 2650,920
  Signal 2 w8: R13.2 2437.43,966.5 v1(2483.93,920)
  Signal 2 w15: v1(2685,920) 2725.44,920 2728.72,923.28 2766.72,923.28 2797,893 2864,893 2928,829 v1(2928,800)
  Signal 2 w20: PS1.2 1935,300.67 1959.41,325.08 C16.1 ; C16.1@1964.25,375 1974.18,384.92 1974.18,409.18 2025.03,460.03 2250.03,460.03 2483.93,693.93 v1(2483.93,920)
pads on no net: D1.3 J1.7 J1.8 J2.3 J2.10 J2.12 J2.13 J3. J3.A8 J3.B8 U1.2 U1.3 U1.4 U1.5 U1.6 U1.15 U1.16 U1.17 U1.18 U1.22 U1.25 U1.26 U1.27 U1.28 U1.29 U1.30 U1.33 U1.34 U1.39 U1.41 U1.42 U1.43 U1.44 U1.46 U3.4 U4.2 U4.6 U4.8 U4.10 U4.11 U4.15 U5.1 U5.10 U5.11 U5.12 U5.13 U5.14 U5.15 U5.16 U5.17 U5.18 U5.19 U5.22 U5.23 U5.24

## Polygon pours and split planes (outlines as drawn)
GND on Ground "GND" (solid, pour order 20): 20,20 20,1795 1575,1795 1575,375 1873,375 1873,200 1575,200 1575,20
USB_GND on Ground "USB_GND" (solid, pour order 19): 1893,20 1893,1795 3075,1795 3115,1755 3115,60 3075,20
USB_GND on Ground "USB_GND" (solid, pour order 1): 1893,20 1893,1795 3115,1795 3115,20
3V3 on Power "3V3" (solid, pour order 22): 20,20 20,1795 1575,1795 1575,375 1873,375 1873,200 1575,200 1575,20
UART_USB_3V3 on Power "UART_USB_3V3" (solid, pour order 3): 1893,20 1893,1795 3115,1795 3115,20
USB_SHIELD_POUR on Signal 1 "USB_SHIELD_POUR" (solid, remove dead copper, pour order 14): 3110,590 3025,590 3025,540 2995,540 2995,590 2935,590 2935,525 2905,525 2905,590 2800,590 2800,640 2920,640 2980,700 2980,895 2915,960 2800,960 2800,1010 3110,1010
DB15_SHIELD_POUR on Signal 1 "DB15_SHIELD_POUR_L01_P006" (solid, remove dead copper, pour order 6): 495,135 495,370 230,370 230,1445 495,1445 495,1570 570,1570 570,1595 495,1595 495,1665 555,1665 555,1690 20,1690 20,135

## Silkscreen, mask and mechanical layers (free items; w line width, h text height)
Top Overlay:
  drawing of 12 lines, arcs and shapes, not listed
  text "High-Voltage Power Supply Controller" at 1526.75,1415 h80
  text "Perry Xu" at 2010,1310 h60
Mechanical 13:
  the board outline again, w2

## Text inside footprints (layer, text, board x,y; h text height)
J2: Assembly Notes "PCB Edge" at -46.26,892.09 h40 r270
J3: Mechanical 13 "PCB EDGE" at 3125.03,1012.6 h16 r90
U2: Top Overlay "*" at 574,391.25 h50 r90